# EAGLE board 10-umax-breakout (EAGLE 5.10)
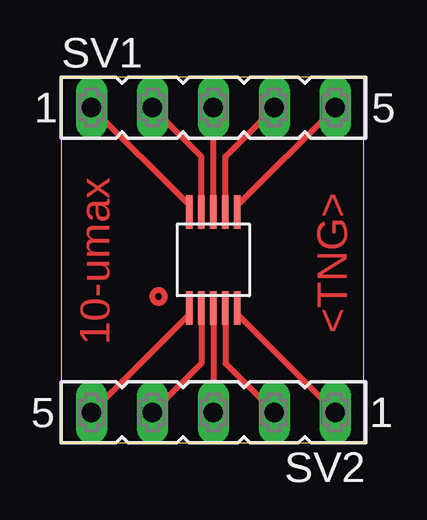
[diagram p0: board, top side]

Size 12.62 x 15.23 mm. Coordinates in mm from the lower left corner, seen from the top.
Outline: 0,0 12.62,0 12.62,15.23 0,15.23 0,0
Copper layers (1*16): Top 0.035mm / dielectric 1.5mm / Bottom 0.035mm
Design rules "default": minimum track width 10mil, minimum drill 24mil, track to track 8mil, track to pad 8mil, pad to pad 8mil, via to via 8mil, smd to smd 8mil, copper to edge 40mil, drill to drill 8mil, minimum pad ring 10mil, minimum via ring 8mil, stop-mask expansion 4mil, vias tented up to drill 0mil, thermal gap 10mil

## Footprints (pad centres in the part's own frame; a part is rotated, then mirrored left to right if it is on the bottom)
FE05-1 = drill 0.813 long: 1 -5.08,0; 2 -2.54,0; 3 0,0; 4 2.54,0; 5 5.08,0
10-UMAX = smd 0.28 x 1.4: 1 -1,-2; 2 -0.5,-2; 3 0,-2; 4 0.5,-2; 5 1,-2; 6 1,2; 7 0.5,2; 8 0,2; 9 -0.5,2; 10 -1,2

## Placement (x,y rotation side)
SV1  [FE05-1]  6.35,13.97 0 top
SV2  [FE05-1]  6.35,1.27 180 top
U$1  10-UMAX  [10-UMAX]  6.35,7.62 0 top

## Library data of the parts
SV1 SV2 = con-lsta
U$1 = custom

## Nets
N$1: SV1.1 U$1.10
N$2: SV1.2 U$1.9
N$3: SV1.3 U$1.8
N$4: SV1.4 U$1.7
N$5: SV1.5 U$1.6
N$6: SV2.5 U$1.1
N$7: SV2.4 U$1.2
N$8: SV2.3 U$1.3
N$9: SV2.2 U$1.4
N$10: SV2.1 U$1.5

## Tracks (layer width: path | path; a pad name or v marks a point on that pad's centre or on a via)
N$1
  Top 0.254: U$1.10 5.35,9.89 SV1.1
N$2
  Top 0.254: U$1.9 5.85,11.93 SV1.2
N$3
  Top 0.254: U$1.8 SV1.3
N$4
  Top 0.254: U$1.7 6.85,11.93 SV1.4
N$5
  Top 0.254: U$1.6 7.35,9.89 SV1.5
N$6
  Top 0.254: U$1.1 5.35,5.35 SV2.5
N$7
  Top 0.254: U$1.2 5.85,3.31 SV2.4
N$8
  Top 0.254: U$1.3 SV2.3
N$9
  Top 0.254: U$1.4 6.85,3.31 SV2.2
N$10
  Top 0.254: U$1.5 7.35,5.35 SV2.1
(copper drawn outside any net)
  shapes: Top circle x1

## Text on the board
Top: <TNG> | 10-umax